# Altium PCB RX_DESIGN.pcbdoc
Units mil, origin at the board's own origin, x right, y up, seen from the top; angles counter-clockwise.
Board outline 2834.65 x 2834.65 mil, 2 copper layers (Top Layer, Bottom Layer); 44 components, 17 nets, 332 pads, 104 vias.
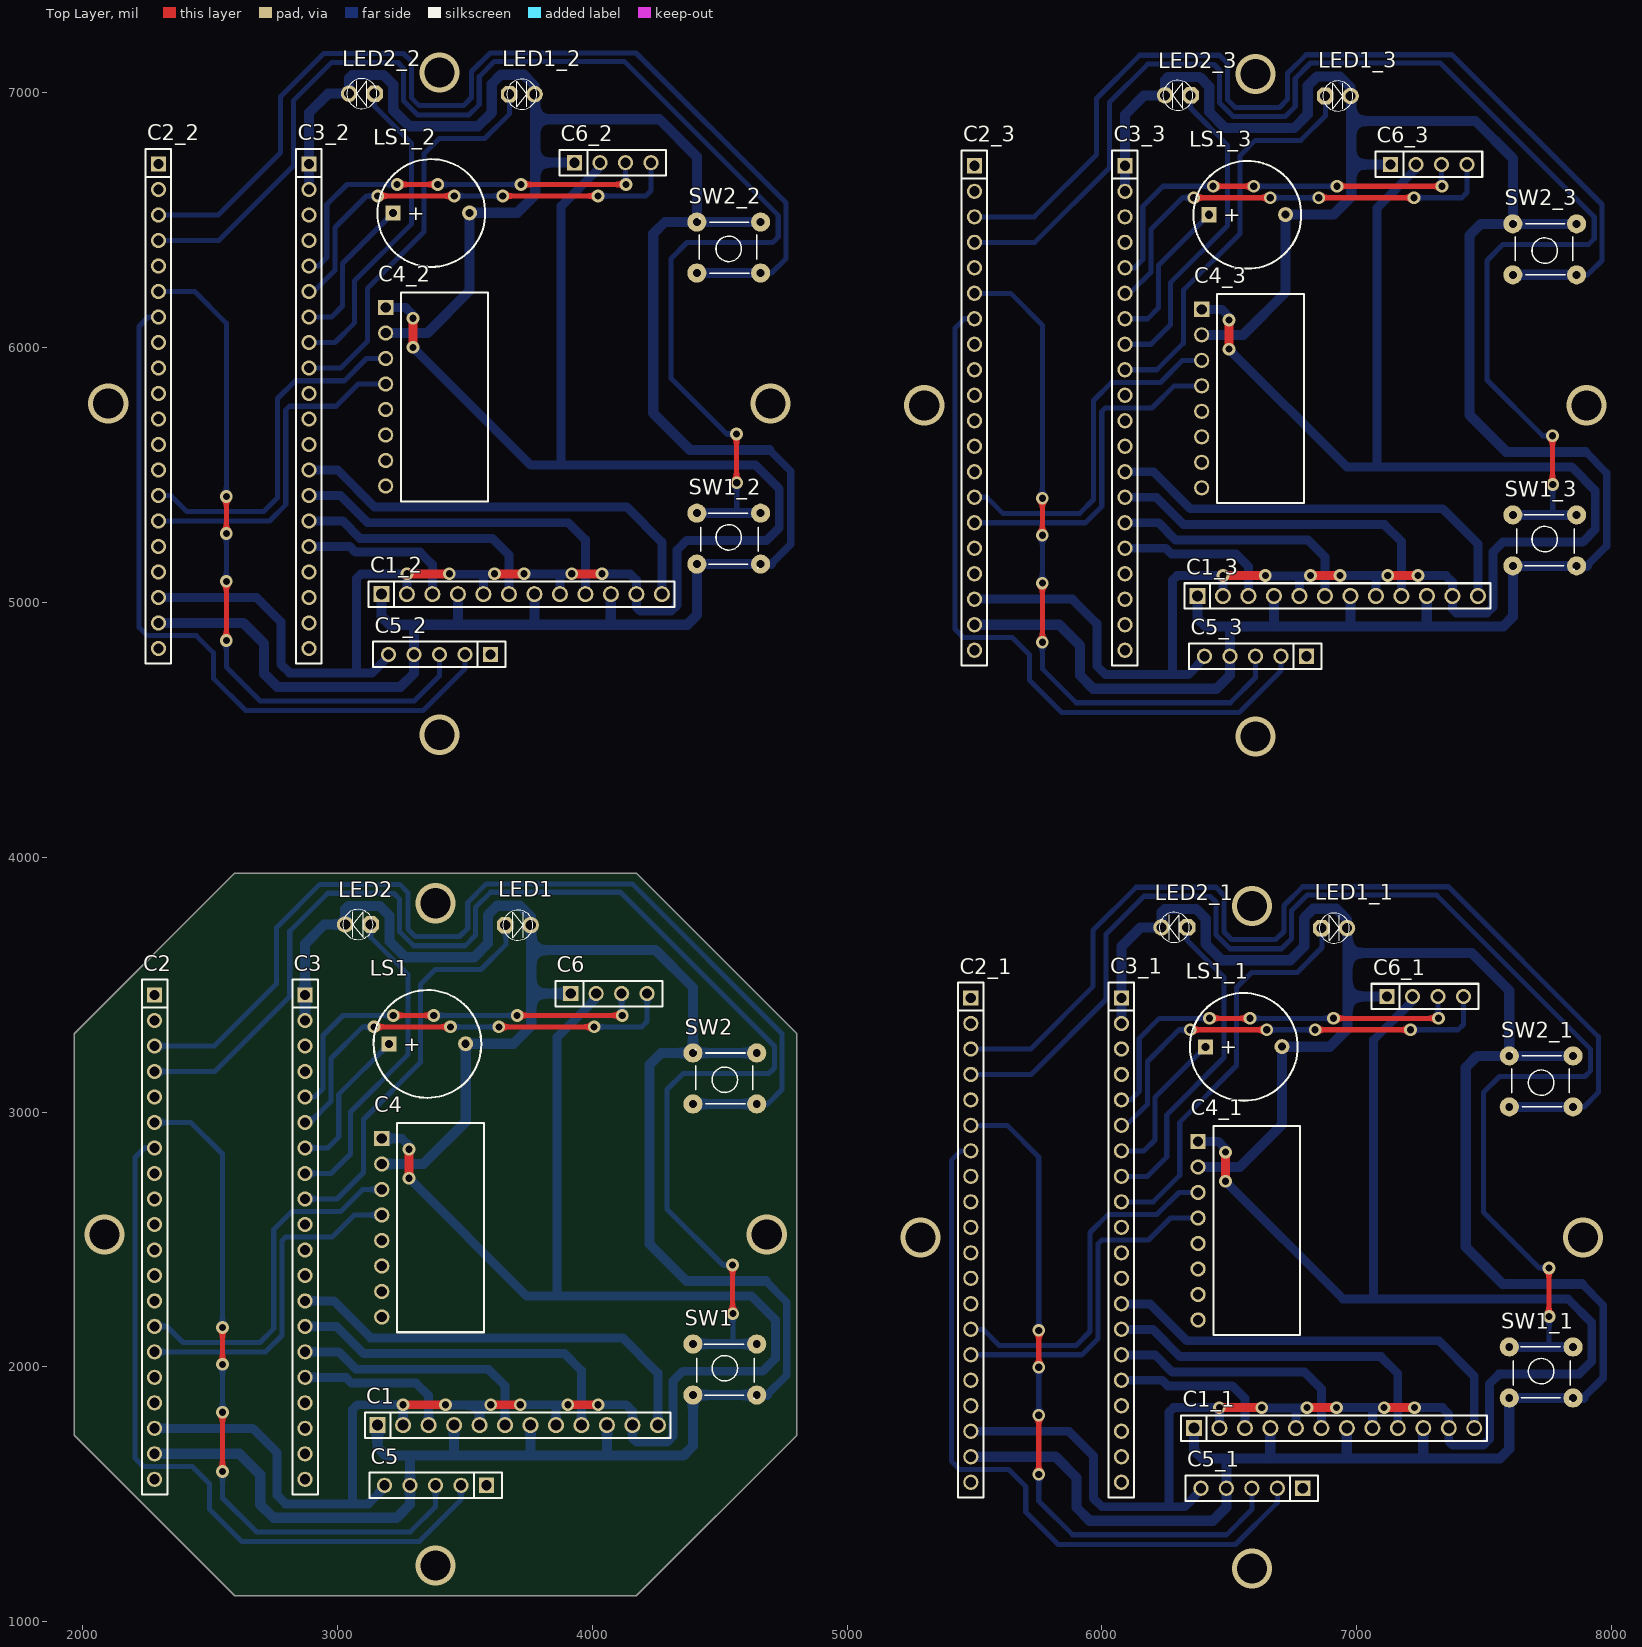
[diagram p0: Top Layer view]
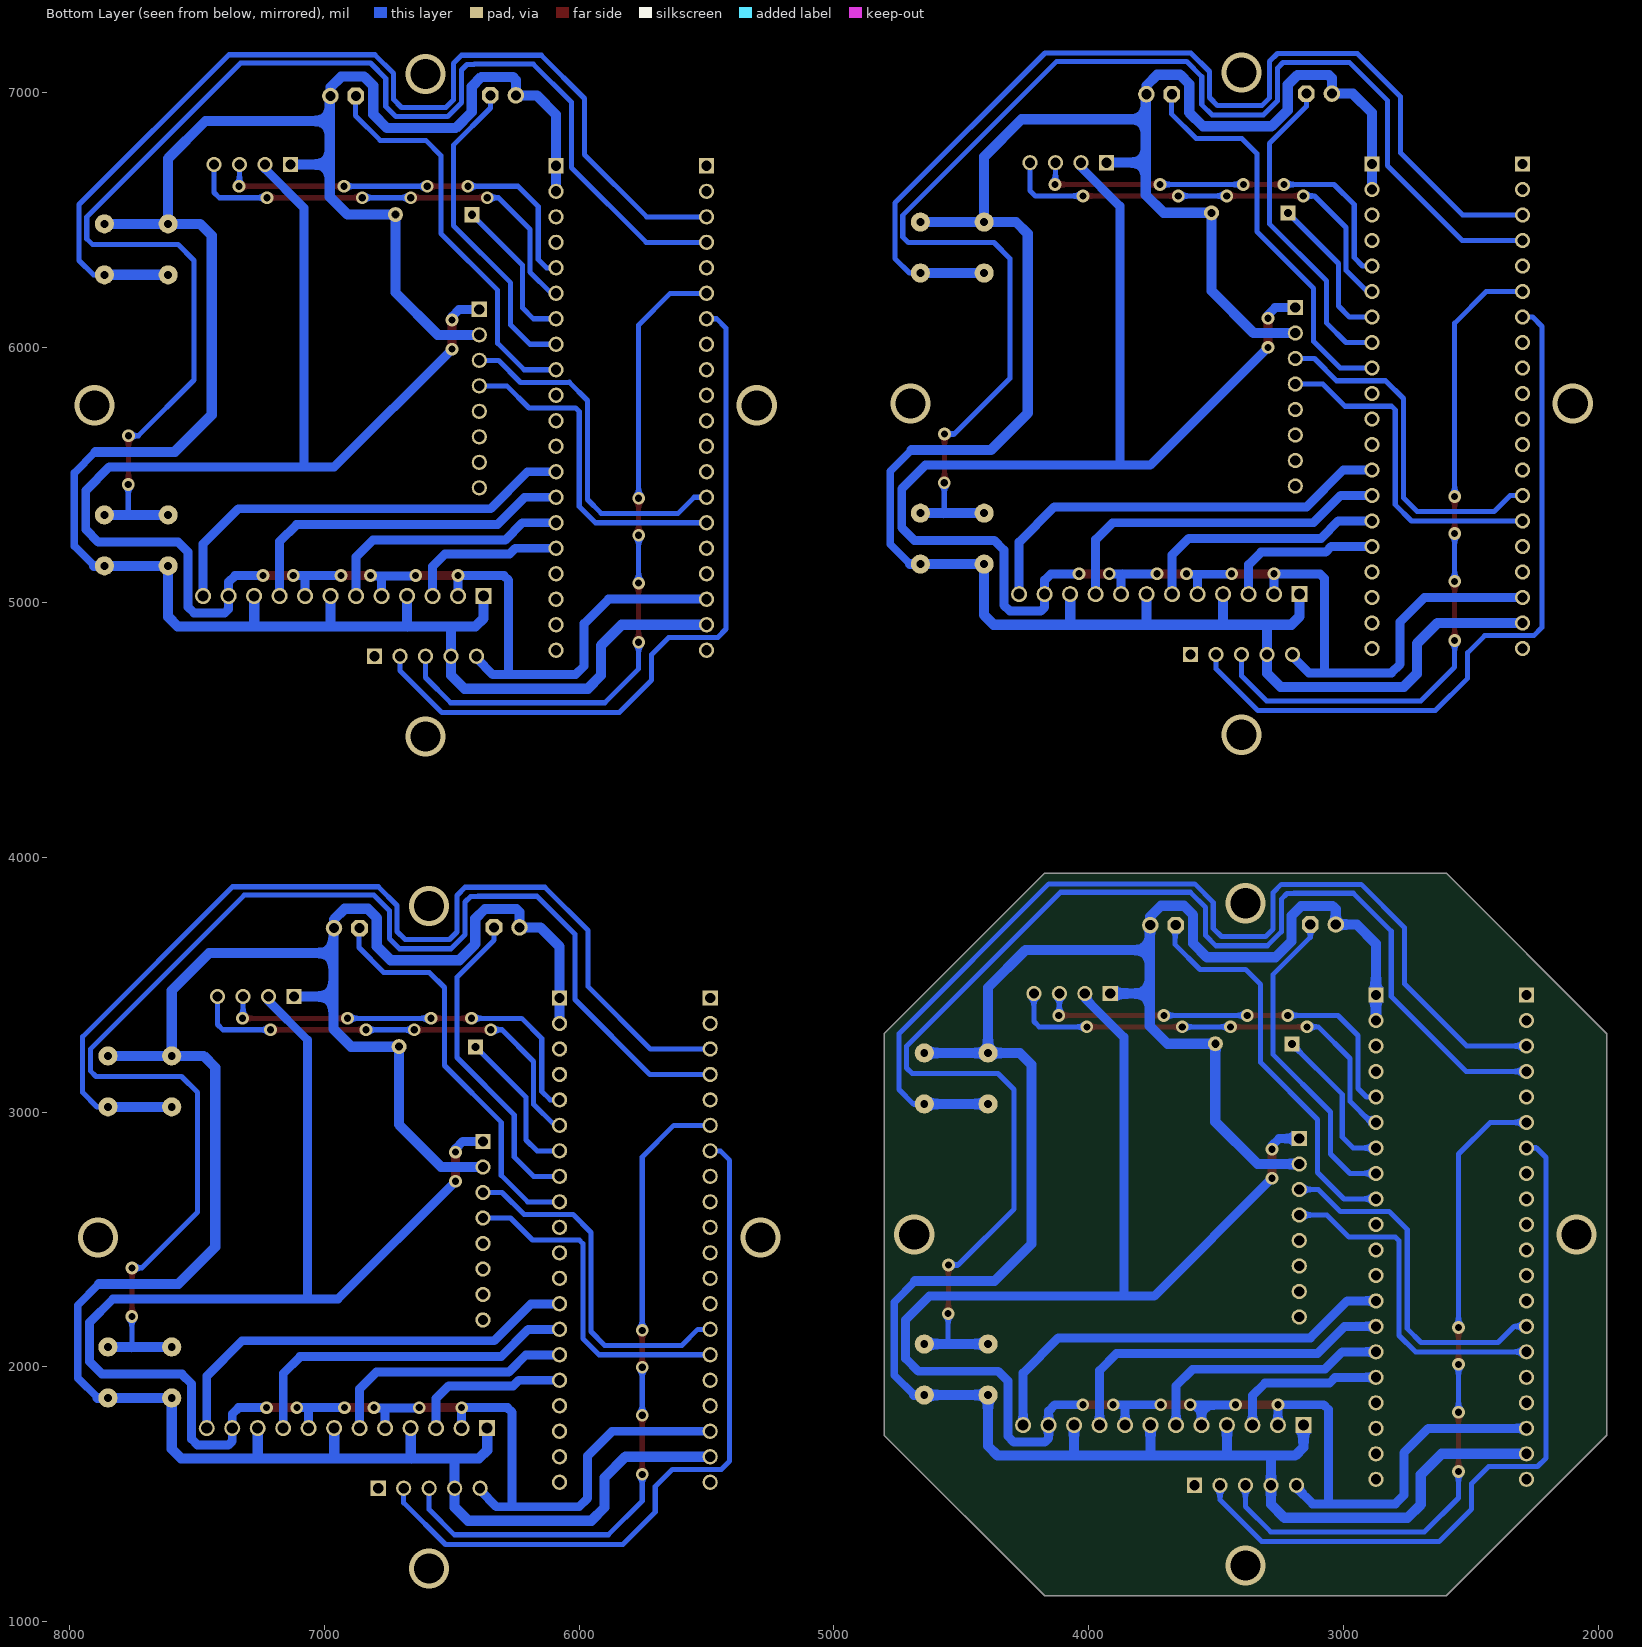
[diagram p1: Bottom Layer view, seen from below]

## Layer stack, top to bottom
Top Solder: solder mask 0.4, Solder Resist, Dk 3.5
Top Layer: signal copper 1.4
Dielectric 1: dielectric 12.6, FR-4, Dk 4.8
Bottom Layer: signal copper 1.4
Bottom Solder: solder mask 0.4, Solder Resist, Dk 3.5

## Board outline
1968.5,1732.28 2598.43,1102.36 4173.23,1102.36 4803.15,1732.28 4803.15,3307.09 4173.23,3937.01 2598.43,3937.01 1968.5,3307.09

## Design rules (kind name [scope] priority, off if disabled: settings)
Clearance [All] p1: gap=10 ignorepadtopadclearanceinfootprint=FALSE except(0: Arc-Hole Track-Hole SMDPad-Hole THPad-Hole Via-Hole Fill-Hole Poly-Hole Region-Hole Text-Hole)
PolygonConnect [All] p1: connectstyle=Relief reliefconductorwidth=10 reliefentries=4 polygonreliefangle="90 Angle" airgapwidth=10
RoutingVias [All] p1: holewidth=28 width=50 viastyle="Through Hole" minholewidth=28 minwidth=50 maxholewidth=28 maxwidth=50
SolderMaskExpansion [All] p1: expansion=4
Width [All] p1: maxlimit=40 minlimit=20 preferedwidth=30
30 further rules are at their usual default settings.

## Classes and differential pairs
component class Sheet1: C1 C2 C3 C4 C5 C6 LED1 LED2 LS1 SW1 SW2

## Components (designator, comment, footprint, x,y, rotation, side; value= is the part's Value field where it differs from the comment)
C1 "PWM PINS OUT" JP12-D1T 3158.27,1771.65 r0 top
C1_1 "PWM PINS OUT" JP12-D1T 6360.44,1760.18 r0 top (schematic designator C1)
C1_2 "PWM PINS OUT" JP12-D1T 3173.44,5031.18 r0 top (schematic designator C1)
C1_3 "PWM PINS OUT" JP12-D1T 6374.44,5024.18 r0 top (schematic designator C1)
C2 "STM32F103C8T6" JP20-C1T 2283.46,3459.06 r270 top
C2_1 "STM32F103C8T6" JP20-C1T 5485.64,3447.58 r270 top (schematic designator C2)
C2_2 "STM32F103C8T6" JP20-C1T 2298.64,6718.58 r270 top (schematic designator C2)
C2_3 "STM32F103C8T6" JP20-C1T 5499.64,6711.58 r270 top (schematic designator C2)
C3 "STM32F103C8T6" JP20-C1T 2874.02,3459.06 r270 top
C3_1 "STM32F103C8T6" JP20-C1T 6076.19,3447.58 r270 top (schematic designator C3)
C3_2 "STM32F103C8T6" JP20-C1T 2889.19,6718.58 r270 top (schematic designator C3)
C3_3 "STM32F103C8T6" JP20-C1T 6090.19,6711.58 r270 top (schematic designator C3)
C4 "MPU6050" JP8-C1C 3175,2546 r270 top
C4_1 "MPU6050" JP8-C1C 6377.17,2534.53 r270 top (schematic designator C4)
C4_2 "MPU6050" JP8-C1C 3190.17,5805.53 r270 top (schematic designator C4)
C4_3 "MPU6050" JP8-C1C 6391.17,5798.53 r270 top (schematic designator C4)
C5 "HC-12" JP5-C1T 3585.83,1535.43 r180 top
C5_1 "HC-12" JP5-C1T 6788,1523.96 r180 top (schematic designator C5)
C5_2 "HC-12" JP5-C1T 3601,4794.96 r180 top (schematic designator C5)
C5_3 "HC-12" JP5-C1T 6802,4787.96 r180 top (schematic designator C5)
C6 "I2C" JP4-C1T 3915.75,3464.57 r0 top
C6_1 "I2C" JP4-C1T 7117.92,3453.09 r0 top (schematic designator C6)
C6_2 "I2C" JP4-C1T 3930.92,6724.09 r0 top (schematic designator C6)
C6_3 "I2C" JP4-C1T 7131.92,6717.09 r0 top (schematic designator C6)
LED1 "LED" LED-3MM-YELLOW 3659,3733 r0 top value="LED 3 ly Single Colour"
LED1_1 "LED" LED-3MM-YELLOW 6861.17,3721.53 r0 top value="LED 3 ly Single Colour" (schematic designator LED1)
LED1_2 "LED" LED-3MM-YELLOW 3674.17,6992.53 r0 top value="LED 3 ly Single Colour" (schematic designator LED1)
LED1_3 "LED" LED-3MM-YELLOW 6875.17,6985.53 r0 top value="LED 3 ly Single Colour" (schematic designator LED1)
LED2 "LED" LED-3MM-YELLOW 3131.5,3735.52 r180 top value="LED 3 ly Single Colour"
LED2_1 "LED" LED-3MM-YELLOW 6333.67,3724.05 r180 top value="LED 3 ly Single Colour" (schematic designator LED2)
LED2_2 "LED" LED-3MM-YELLOW 3146.67,6995.05 r180 top value="LED 3 ly Single Colour" (schematic designator LED2)
LED2_3 "LED" LED-3MM-YELLOW 6347.67,6988.05 r180 top value="LED 3 ly Single Colour" (schematic designator LED2)
LS1 "Speaker" SPEAKER 3203.94,3267.22 r0 top
LS1_1 "Speaker" SPEAKER 6406.11,3255.74 r0 top (schematic designator LS1)
LS1_2 "Speaker" SPEAKER 3219.11,6526.74 r0 top (schematic designator LS1)
LS1_3 "Speaker" SPEAKER 6420.11,6519.74 r0 top (schematic designator LS1)
SW1 "SW" SW2-DIP 4395.67,2089.76 r0 top value="Button chip 4 pin"
SW1_1 "SW" SW2-DIP 7597.84,2078.29 r0 top value="Button chip 4 pin" (schematic designator SW1)
SW1_2 "SW" SW2-DIP 4410.84,5349.29 r0 top value="Button chip 4 pin" (schematic designator SW1)
SW1_3 "SW" SW2-DIP 7611.84,5342.29 r0 top value="Button chip 4 pin" (schematic designator SW1)
SW2 "SW" SW2-DIP 4645.67,3031.5 r180 top value="Button chip 4 pin"
SW2_1 "SW" SW2-DIP 7847.84,3020.02 r180 top value="Button chip 4 pin" (schematic designator SW2)
SW2_2 "SW" SW2-DIP 4660.84,6291.02 r180 top value="Button chip 4 pin" (schematic designator SW2)
SW2_3 "SW" SW2-DIP 7861.84,6284.02 r180 top value="Button chip 4 pin" (schematic designator SW2)

## Footprints (in the part's own frame and the unit in brackets; to place one, negate y for a bottom-side part, rotate by r counter-clockwise, add the part's x,y. Pads: shape width x height; smd on the part's side, far side on the other; paste and mask are expansions set on the pad)
JP4-C1T [mm] "4 row, straight, gold plating"
  rect 1.52x1.52 hole 1.02: 1(0,0)
  round 1.52 hole 1.02: 2(2.54,0) 3(5.08,0) 4(7.62,0)
  silkscreen extent -1.52,-1.27 9.14,1.27, body extent -1.52,-1.25 9.14,1.25, height 8.51
JP5-C1T [mm] "5 row, straight, gold plating"
  rect 1.52x1.52 hole 1.02: 1(0,0)
  round 1.52 hole 1.02: 2(2.54,0) 3(5.08,0) 4(7.62,0) 5(10.16,0)
  silkscreen extent -1.52,-1.27 11.68,1.27, body extent -1.52,-1.25 11.68,1.25, height 8.51
JP8-C1C [mm] "08p 1 row Right angle"
  rect 1.52x1.52 hole 1.02: 1(-8.89,0)
  round 1.52 hole 1.02: 2(-6.35,0) 3(-3.81,0) 4(-1.27,0) 5(1.27,0) 6(3.81,0) 7(6.35,0) 8(8.89,0)
  silkscreen extent -10.41,1.52 10.41,10.17, body extent -10.41,-0.25 10.41,10.05, height 2.51
JP12-D1T [mm] "12 pins, 1 row, straight, gold plating"
  rect 1.6x1.6 hole 1.1: 1(0,0)
  round 1.6 hole 1.1: 2(2.54,0) 3(5.08,0) 4(7.62,0) 5(10.16,0) 6(12.7,0) 7(15.24,0) 8(17.78,0) 9(20.32,0) 10(22.86,0) 11(25.4,0) 12(27.94,0)
  silkscreen extent -1.27,-1.27 29.21,1.27, body extent -1.27,-1.27 29.21,1.27, height 8.54
JP20-C1T [mm] "20 row, straight, gold plating"
  rect 1.52x1.52 hole 1.02: 1(0,0)
  round 1.52 hole 1.02: 2(2.54,0) 3(5.08,0) 4(7.62,0) 5(10.16,0) 6(12.7,0) 7(15.24,0) 8(17.78,0) 9(20.32,0) 10(22.86,0) 11(25.4,0) 12(27.94,0) 13(30.48,0) 14(33.02,0) 15(35.56,0) 16(38.1,0) 17(40.64,0) 18(43.18,0) 19(45.72,0) 20(48.26,0)
  silkscreen extent -1.52,-1.27 49.78,1.27, body extent -1.52,-1.25 49.78,1.25, height 8.51
LED-3MM-YELLOW [mil]
  oct 65x65 hole 40: 1(0,0)
  round 65 hole 40: 2(100,0)
  silkscreen extent -9,-59 109,59, body extent -27,-77 117,80, height 181
SPEAKER [mm]
  rect 1.5x1.5 hole 0.8: 1(0,0)
  round 1.5 hole 0.8: 2(7.62,0.013)
  silkscreen extent -1.55,-5.38 9.18,5.36, body extent -2.22,-6 13.24,6, height 4.5
SW2-DIP [mil] "SW button 4pin, 250 x250 mil"
  round 75 hole 31: 1(0,0) 2(0,-200) 3(250,-200) 4(250,0)
  silkscreen extent 15,-215 240,0, body extent -36,-220 276,24, height 276

## Part data
C1 C1_1 C1_2 C1_3: library part JP12, "WR-PHD 2.54 mm Angled Socket Header", Manufacturer="Würth Elektronik eiSos GmbH", partNo=613012143121, ComponentLink1 Description=Manufacturer, ComponentLink1URL=http://www.we-online.com, ComponentLink2 Description=Datasheet, ComponentLink2URL=http://katalog.we-online.de/em/datasheet/6130xx143121.pdf, Created by="Karrer Zheng", Created Date="29 March 2013", NoPins=12
C2 C2_1 C2_2 C2_3 C3 C3_1 C3_2 C3_3: library part JP20, "WR-PHD 2.54 mm Angled Socket Header", Manufacturer="Würth Elektronik eiSos GmbH", partNo=613020143121, ComponentLink1 Description=Manufacturer, ComponentLink1URL=http://www.we-online.com, ComponentLink2 Description=Datasheet, ComponentLink2URL=http://katalog.we-online.de/em/datasheet/6130xx143121.pdf, Created by="Karrer Zheng", Created Date="29 March 2013", NoPins=20
C4 C4_1 C4_2 C4_3: library part JP8, "WR-PHD 2.54 mm Angled Socket Header", Manufacturer="Würth Elektronik eiSos GmbH", partNo=613008143121, ComponentLink1 Description=Manufacturer, ComponentLink1URL=http://www.we-online.com, ComponentLink2 Description=Datasheet, ComponentLink2URL=http://katalog.we-online.de/em/datasheet/6130xx143121.pdf, Created by="Karrer Zheng", Created Date="29 March 2013", NoPins=08
C5 C5_1 C5_2 C5_3: library part JP5, "WR-PHD 2.54 mm Angled Socket Header", Manufacturer="Würth Elektronik eiSos GmbH", partNo=613005143121, ComponentLink1 Description=Manufacturer, ComponentLink1URL=http://www.we-online.com, ComponentLink2 Description=Datasheet, ComponentLink2URL=http://katalog.we-online.de/em/datasheet/6130xx143121.pdf, Created by="Karrer Zheng", Created Date="29 March 2013", NoPins=05
C6 C6_1 C6_2 C6_3: library part JP4, "WR-PHD 2.54 mm Angled Socket Header", Manufacturer="Würth Elektronik eiSos GmbH", partNo=613004143121, ComponentLink1 Description=Manufacturer, ComponentLink1URL=http://www.we-online.com, ComponentLink2 Description=Datasheet, ComponentLink2URL=http://katalog.we-online.de/em/datasheet/6130xx143121.pdf, Created by="Karrer Zheng", Created Date="29 March 2013", NoPins=04
LED1 LED1_1 LED1_2 LED1_3 LED2 LED2_1 LED2_2 LED2_3: "LED Single colour Green and Red"
LS1 LS1_1 LS1_2 LS1_3: "Loudspeaker", LatestRevisionDate=17-Jul-2002, LatestRevisionNote="Re-released for DXP Platform.", PackageReference=PIN2, Published=24-Mar-1999, Publisher="Altium Limited"
SW1 SW1_1 SW1_2 SW1_3 SW2 SW2_1 SW2_2 SW2_3: library part SW4, "Switch button 4 pin"

## Via types
v1: diameter 50, hole 28, Top Layer to Bottom Layer, 88 vias
v2: diameter 157.48, hole 118.11, Top Layer to Bottom Layer, 16 vias

## Nets (pads, with @x,y where several pads share a name; then routed paths per layer and width w, separated by ;. In a path a pad name is that pad's centre, name@x,y a point inside that pad or via, vN(x,y) a via of type N, cw(c..) or ccw(c..) an arc to the next point about the centre after c; other vN are vias at no path point)
BUZZER: C3.7 LS1.1 | length 597
  Bottom Layer w20: C3.7 2963.06,2859.06 3006,2902 3006,3069.28 LS1.1
GND: C1.1 C1.4 C1.7 C1.10 C2.19 C3.1 C3.2 C4.2 C5.4 C6.1 LED1.2 LED2.2 LS1.2 SW1.2 SW1.3 SW2.2 SW2.3 | length 9883.6
  Bottom Layer w30: 4681,2337 4764,2254 4764,1968 4685.76,1889.76
  Bottom Layer w40: C2.19 2615.94,1659.06 2698,1577 2698,1460 2750,1408 3233,1408 3285.83,1460.83 C5.4 3285.83,1651.83 3286,1652 ; C3.2 C3.1 2874.02,3660.02 2949.52,3735.52 LED2.2 3031.5,3795.5 3044,3808 3167,3808 3205,3770 3205,3670 3268,3607 3537,3607 3591,3661 3591,3773 3627,3809 3717,3809 3759,3767 LED1.2 3761.42,3730.58 3761.42,3635 ; C1.1 3158.27,1684.73 3191,1652 3286,1652 ; C4.2 3338,2796 3503.94,2961.94 LS1.2 3691.72,3267.72 3761.42,3337.42 3761.42,3464.57 ; C1.4 3458.27,1653.27 3457,1652 ; C1.7 3758.27,1654.73 3761,1652 ; C6.1 3761.42,3464.57 ; C1.10 4058.27,1652.73 4059,1652 ; SW2.2 SW2.3 ; 4681,2337 4370,2337 4225,2482 4225,3186 4270.5,3231.5 SW2.3 ; 4685.76,1889.76 SW1.3 SW1.2 4395.67,1689.67 4358,1652 4059,1652 ; 3286,1652 3457,1652 ; 3457,1652 3761,1652 ; 3761,1652 4059,1652 ; 3761.42,3464.57 3761.42,3635 ; 3761.42,3635 4249,3635 4395.67,3488.33 SW2.3
LED1: C3.9 LED1.1 | length 1579.2
  Bottom Layer w20: C3.9 2999.06,2659.06 3103,2763 3103,2971 3326,3194 3326,3500 3385,3559 3564,3559 3661.42,3656.42 3661.42,3730.58 LED1.1
LED2: C3.8 LED2.1 | length 1263.4
  Bottom Layer w20: C3.8 2976.06,2759.06 3052,2835 3052,3000 3277,3225 3277,3540 3131.5,3685.5 LED2.1
PWM1: C1.3 C3.16 | length 629.9
  Bottom Layer w35: C3.16 3033.94,1959.06 3056,1937 3309,1937 3358.27,1887.73 C1.3
PWM2: C1.6 C3.15 | length 993.6
  Bottom Layer w35: C3.15 3005.94,2059.06 3074,1991 3593,1991 3658.27,1925.73 C1.6
PWM3: C1.9 C3.14 | length 1370.1
  Bottom Layer w35: C3.14 2996.94,2159.06 3104,2052 3892,2052 3958.27,1985.73 C1.9
PWM4: C1.12 C3.13 | length 1705.7
  Bottom Layer w35: C3.13 2985.94,2259.06 3131,2114 4120,2114 4258.27,1975.73 C1.12
RXD: C2.6 C5.3 | length 2682.4
  Top Layer w20: v1(2550,1590) v1(2550,1822) ; v1(2550,2010) v1(2550,2155)
  Bottom Layer w20: C2.6 2425.94,2959.06 2550,2835 v1(2550,2155) ; v1(2550,1590) 2550,1486 2683,1353 3287,1353 3385.83,1451.83 C5.3 ; v1(2550,1822) v1(2550,2010)
SCL1: C2.14 C4.3 | length 1413.1
  Bottom Layer w20: C2.14 2331.94,2159.06 2395,2096 2697,2096 2751,2150 2751,2539 2822,2610 2822.87,2609.13 3013.13,2609.13 3100,2696 C4.3 C4.3@3162.02,2708.98
SCL2: C3.6 C6.4 | length 1713.9
  Top Layer w20: v1(3144,3334) v1(3444,3334) ; v1(3634,3334) v1(4008,3334)
  Bottom Layer w20: C3.6 2893.06,2959.06 2976,3042 2976,3210 3100,3334 v1(3144,3334) ; v1(3444,3334) v1(3634,3334) ; v1(4008,3334) 4195,3334 4215.75,3354.75 C6.4
SDA1: C2.15 C4.4 | length 1350.2
  Bottom Layer w20: C2.15 2719.06,2059.06 2783,2123 2783,2495 2796.98,2508.98 2979.98,2508.98 3067,2596 C4.4 C4.4@3162,2609
SDA2: C3.5 C6.3 | length 1584.9
  Top Layer w20: v1(3220,3379) v1(3379,3379) ; v1(3706,3379) v1(4118,3379)
  Bottom Layer w20: C3.5 2911.06,3059.06 2944,3092 2944,3300 3023,3379 v1(3220,3379) ; v1(3379,3379) v1(3706,3379) ; C6.3 4115.75,3381.25 v1(4118,3379)
SW1: C2.4 SW1.1 SW1.4 | length 5352.3
  Top Layer w20: v1(4551,2400) 4551,2210 v1(4552,2209)
  Bottom Layer w20: C2.4 2520.06,3159.06 2814,3453 2814,3709 2963,3858 3194.57,3858 3195.57,3857 3223,3857 3245,3835 3245,3707 3300,3652 3502,3652 3542,3692 3542,3802 3602,3862 4111,3862 4715,3258 4715,3173 4693,3151 4357,3151 4294,3088 4294,2619 4513,2400 v1(4551,2400) ; v1(4552,2209) 4552,2091.76 4554,2089.76
  Bottom Layer w40: SW1.1 4554,2089.76 SW1.4
SW2: C2.3 SW2.1 SW2.4 | length 4002.8
  Bottom Layer w20: C2.3 2518.06,3259.06 2762,3503 2762,3723 2932,3893 3245,3893 3277,3861 3277,3717.43 3306.43,3688 3480,3688 3512,3720 3512,3822 3585,3895 4157,3895 4745,3307 4745,3088 4688.5,3031.5 SW2.1
  Bottom Layer w40: SW2.4 SW2.1
TXD: C2.7 C5.2 | length 2869.1
  Bottom Layer w20: C2.7 2244.06,2859.06 2207,2822 2207,1642 2239.87,1609.13 2431.87,1609.13 2499,1542 2499,1442 2626,1315 3322,1315 3485.83,1478.83 C5.2
VCC: C1.2 C1.5 C1.8 C1.11 C2.18 C4.1 C5.5 C6.2 | length 7138.3
  Top Layer w35: v1(3258.27,1851.73) v1(3424.73,1851.73) ; v1(3282,2740) v1(3282,2854) ; v1(3602.27,1851.73) v1(3718,1851.73) v1@3720.73,1851.73 ; v1(3904.73,1851.73) v1(4023.73,1851.73)
  Bottom Layer w35: C2.18 2667.94,1759.06 2764,1663 2764,1497 2798,1463 3060,1463 3060,1833 3078.73,1851.73 v1(3258.27,1851.73) C1.2 ; 3062,1463 3122,1463 3185.83,1526.83 C5.5 ; C4.1 3254,2896 3282,2868 v1(3282,2854) ; v1(3282,2740) 3744,2278 3866,2278 ; v1(3424.73,1851.73) 3426.46,1850 3558.27,1850 ; C1.5 3558.27,1850 ; v1(3602.27,1851.73) 3600.54,1850 3558.27,1850 ; v1(3718,1851.73) 3854,1851.73 ; C1.8 3858.27,1847.46 3854,1851.73 ; v1(3904.73,1851.73) 3854,1851.73 ; C6.2 4015.75,3446.75 3863,3294 3863,2281 3866,2278 ; v1(4023.73,1851.73) 4133.27,1851.73 4158.27,1826.73 C1.11 4158.27,1720.73 4174,1705 4294,1705 4318,1729 4318,1945 4356,1983 4669,1983 4719,2033 4719,2185 4626,2278 3866,2278
pads on no net: C1_1.1 C1_1.2 C1_1.3 C1_1.4 C1_1.5 C1_1.6 C1_1.7 C1_1.8 C1_1.9 C1_1.10 C1_1.11 C1_1.12 C1_2.1 C1_2.2 C1_2.3 C1_2.4 C1_2.5 C1_2.6 C1_2.7 C1_2.8 C1_2.9 C1_2.10 C1_2.11 C1_2.12 C1_3.1 C1_3.2 C1_3.3 C1_3.4 C1_3.5 C1_3.6 C1_3.7 C1_3.8 C1_3.9 C1_3.10 C1_3.11 C1_3.12 C2.1 C2.2 C2.5 C2.8 C2.9 C2.10 C2.11 C2.12 C2.13 C2.16 C2.17 C2.20 C2_1.1 C2_1.2 C2_1.3 C2_1.4 C2_1.5 C2_1.6 C2_1.7 C2_1.8 C2_1.9 C2_1.10 C2_1.11 C2_1.12 C2_1.13 C2_1.14 C2_1.15 C2_1.16 C2_1.17 C2_1.18 C2_1.19 C2_1.20 C2_2.1 C2_2.2 C2_2.3 C2_2.4 C2_2.5 C2_2.6 C2_2.7 C2_2.8 C2_2.9 C2_2.10 C2_2.11 C2_2.12 C2_2.13 C2_2.14 C2_2.15 C2_2.16 C2_2.17 C2_2.18 C2_2.19 C2_2.20 C2_3.1 C2_3.2 C2_3.3 C2_3.4 C2_3.5 C2_3.6 C2_3.7 C2_3.8 C2_3.9 C2_3.10 C2_3.11 C2_3.12 C2_3.13 C2_3.14 C2_3.15 C2_3.16 C2_3.17 C2_3.18 C2_3.19 C2_3.20 C3.3 C3.4 C3.10 C3.11 C3.12 C3.17 C3.18 C3.19 C3.20 C3_1.1 C3_1.2 C3_1.3 C3_1.4 C3_1.5 C3_1.6 C3_1.7 C3_1.8 C3_1.9 C3_1.10 C3_1.11 C3_1.12 C3_1.13 C3_1.14 C3_1.15 C3_1.16 C3_1.17 C3_1.18 C3_1.19 C3_1.20 C3_2.1 C3_2.2 C3_2.3 C3_2.4 C3_2.5 C3_2.6 C3_2.7 C3_2.8 C3_2.9 C3_2.10 C3_2.11 C3_2.12 C3_2.13 C3_2.14 C3_2.15 C3_2.16 C3_2.17 C3_2.18 C3_2.19 C3_2.20 C3_3.1 C3_3.2 C3_3.3 C3_3.4 C3_3.5 C3_3.6 C3_3.7 C3_3.8 C3_3.9 C3_3.10 C3_3.11 C3_3.12 C3_3.13 C3_3.14 C3_3.15 C3_3.16 C3_3.17 C3_3.18 C3_3.19 C3_3.20 C4.5 C4.6 C4.7 C4.8 C4_1.1 C4_1.2 C4_1.3 C4_1.4 C4_1.5 C4_1.6 C4_1.7 C4_1.8 C4_2.1 C4_2.2 C4_2.3 C4_2.4 C4_2.5 C4_2.6 C4_2.7 C4_2.8 C4_3.1 C4_3.2 C4_3.3 C4_3.4 C4_3.5 C4_3.6 C4_3.7 C4_3.8 C5.1 C5_1.1 C5_1.2 C5_1.3 C5_1.4 C5_1.5 C5_2.1 C5_2.2 C5_2.3 C5_2.4 C5_2.5 C5_3.1 C5_3.2 C5_3.3 C5_3.4 C5_3.5 C6_1.1 C6_1.2 C6_1.3 C6_1.4 C6_2.1 C6_2.2 C6_2.3 C6_2.4 C6_3.1 C6_3.2 C6_3.3 C6_3.4 LED1_1.1 LED1_1.2 LED1_2.1 LED1_2.2 LED1_3.1 LED1_3.2 LED2_1.1 LED2_1.2 LED2_2.1 LED2_2.2 LED2_3.1 LED2_3.2 LS1_1.1 LS1_1.2 LS1_2.1 LS1_2.2 LS1_3.1 LS1_3.2 SW1_1.1 SW1_1.2 SW1_1.3 SW1_1.4 SW1_2.1 SW1_2.2 SW1_2.3 SW1_2.4 SW1_3.1 SW1_3.2 SW1_3.3 SW1_3.4 SW2_1.1 SW2_1.2 SW2_1.3 SW2_1.4 SW2_2.1 SW2_2.2 SW2_2.3 SW2_2.4 SW2_3.1 SW2_3.2 SW2_3.3 SW2_3.4
copper on no net: | length 138388.6
  Top Layer w20: v1(2565.17,4849.53) v1(2565.17,5081.53) ; v1(2565.17,5269.53) v1(2565.17,5414.53) ; v1(3159.17,6593.53) v1(3459.17,6593.53) ; v1(3235.17,6638.53) v1(3394.17,6638.53) ; v1(3649.17,6593.53) v1(4023.17,6593.53) ; v1(3721.17,6638.53) v1(4133.17,6638.53) ; v1(4566.17,5659.53) 4566.17,5469.53 v1(4567.17,5468.53) ; v1(5752.17,1578.53) v1(5752.17,1810.53) ; v1(5752.17,1998.53) v1(5752.17,2143.53) ; v1(5766.17,4842.53) v1(5766.17,5074.53) ; v1(5766.17,5262.53) v1(5766.17,5407.53) ; v1(6346.17,3322.53) v1(6646.17,3322.53) ; v1(6360.17,6586.53) v1(6660.17,6586.53) ; v1(6422.17,3367.53) v1(6581.17,3367.53) ; v1(6436.17,6631.53) v1(6595.17,6631.53) ; v1(6836.17,3322.53) v1(7210.17,3322.53) ; v1(6850.17,6586.53) v1(7224.17,6586.53) ; v1(6908.17,3367.53) v1(7320.17,3367.53) ; v1(6922.17,6631.53) v1(7334.17,6631.53) ; v1(7753.17,2388.53) 7753.17,2198.53 v1(7754.17,2197.53) ; v1(7767.17,5652.53) 7767.17,5462.53 v1(7768.17,5461.53)
  Top Layer w35: v1(3273.44,5111.26) v1(3439.91,5111.26) ; v1(3297.17,5999.53) v1(3297.17,6113.53) ; v1(3617.44,5111.26) v1(3733.17,5111.26) v1@3735.91,5111.26 ; v1(3919.91,5111.26) v1(4038.91,5111.26) ; v1(6460.44,1840.26) v1(6626.91,1840.26) ; v1(6474.44,5104.26) v1(6640.91,5104.26) ; v1(6484.17,2728.53) v1(6484.17,2842.53) ; v1(6498.17,5992.53) v1(6498.17,6106.53) ; v1(6804.44,1840.26) v1(6920.17,1840.26) v1@6922.91,1840.26 ; v1(6818.44,5104.26) v1(6934.17,5104.26) v1@6936.91,5104.26 ; v1(7106.91,1840.26) v1(7225.91,1840.26) ; v1(7120.91,5104.26) v1(7239.91,5104.26)
  Bottom Layer w20: 2298.64,5318.58 2734.23,5318.58 2798.17,5382.53 2798.17,5754.53 2812.15,5768.5 2995.15,5768.5 3082.17,5855.53 3190.17,5855.53 3177.17,5868.53 ; 2298.64,5418.58 2347.12,5418.58 2410.17,5355.53 2712.17,5355.53 2766.17,5409.53 2766.17,5798.53 2837.17,5869.53 2838.04,5868.66 3028.31,5868.66 3115.17,5955.53 3190.17,5955.53 3177.2,5968.5 ; 2298.64,6118.58 2259.23,6118.58 2222.17,6081.53 2222.17,4901.53 2255.04,4868.66 2447.04,4868.66 2514.17,4801.53 2514.17,4701.53 2641.17,4574.53 3337.17,4574.53 3501,4738.35 3501,4794.96 ; 2298.64,6218.58 2441.12,6218.58 2565.17,6094.53 v1(2565.17,5414.53) ; 2298.64,6418.58 2535.23,6418.58 2829.17,6712.53 2829.17,6968.53 2978.17,7117.53 3209.74,7117.53 3210.74,7116.53 3238.17,7116.53 3260.17,7094.53 3260.17,6966.53 3315.17,6911.53 3517.17,6911.53 3557.17,6951.53 3557.17,7061.53 3617.17,7121.53 4126.17,7121.53 4730.17,6517.53 4730.17,6432.53 4708.17,6410.53 4372.17,6410.53 4309.17,6347.53 4309.17,5878.53 4528.17,5659.53 v1(4566.17,5659.53) ; 2298.64,6518.58 2533.23,6518.58 2777.17,6762.53 2777.17,6982.53 2947.17,7152.53 3260.17,7152.53 3292.17,7120.53 3292.17,6976.95 3321.6,6947.53 3495.17,6947.53 3527.17,6979.53 3527.17,7081.53 3600.17,7154.53 4172.17,7154.53 4760.17,6566.53 4760.17,6347.53 4703.67,6291.02 4660.84,6291.02 ; v1(2565.17,4849.53) 2565.17,4745.53 2698.17,4612.53 3302.17,4612.53 3401,4711.35 3401,4794.96 ; v1(2565.17,5081.53) v1(2565.17,5269.53) ; 2889.19,5918.58 3014.23,5918.58 3118.17,6022.53 3118.17,6230.53 3341.17,6453.53 3341.17,6759.53 3400.17,6818.53 3579.17,6818.53 3676.59,6915.94 3676.59,6990.11 3674.17,6992.53 ; 2889.19,6018.58 2991.23,6018.58 3067.17,6094.53 3067.17,6259.53 3292.17,6484.53 3292.17,6799.53 3146.67,6945.03 3146.67,6995.05 ; 2889.19,6118.58 2978.23,6118.58 3021.17,6161.53 3021.17,6328.81 3219.11,6526.74 ; 2889.19,6218.58 2908.23,6218.58 2991.17,6301.53 2991.17,6469.53 3115.17,6593.53 v1(3159.17,6593.53) ; 2889.19,6318.58 2926.23,6318.58 2959.17,6351.53 2959.17,6559.53 3038.17,6638.53 v1(3235.17,6638.53) ; v1(3394.17,6638.53) v1(3721.17,6638.53) ; v1(3459.17,6593.53) v1(3649.17,6593.53) ; v1(4023.17,6593.53) 4210.17,6593.53 4230.92,6614.28 4230.92,6724.09 ; 4130.92,6724.09 4130.92,6640.78 v1(4133.17,6638.53) ; v1(4567.17,5468.53) 4567.17,5351.29 4569.17,5349.29 ; 5485.64,2047.58 5921.23,2047.58 5985.17,2111.53 5985.17,2483.53 5999.15,2497.5 6182.15,2497.5 6269.17,2584.53 6377.17,2584.53 6364.17,2597.53 ; 5485.64,2147.58 5534.12,2147.58 5597.17,2084.53 5899.17,2084.53 5953.17,2138.53 5953.17,2527.53 6024.17,2598.53 6025.04,2597.66 6215.31,2597.66 6302.17,2684.53 6377.17,2684.53 6364.2,2697.5 ; 5485.64,2847.58 5446.23,2847.58 5409.17,2810.53 5409.17,1630.53 5442.04,1597.66 5634.04,1597.66 5701.17,1530.53 5701.17,1430.53 5828.17,1303.53 6524.17,1303.53 6688,1467.35 6688,1523.96 ; 5485.64,2947.58 5628.12,2947.58 5752.17,2823.53 v1(5752.17,2143.53) ; 5485.64,3147.58 5722.23,3147.58 6016.17,3441.53 6016.17,3697.53 6165.17,3846.53 6396.74,3846.53 6397.74,3845.53 6425.17,3845.53 6447.17,3823.53 6447.17,3695.53 6502.17,3640.53 6704.17,3640.53 6744.17,3680.53 6744.17,3790.53 6804.17,3850.53 7313.17,3850.53 7917.17,3246.53 7917.17,3161.53 7895.17,3139.53 7559.17,3139.53 7496.17,3076.53 7496.17,2607.53 7715.17,2388.53 v1(7753.17,2388.53) ; 5485.64,3247.58 5720.23,3247.58 5964.17,3491.53 5964.17,3711.53 6134.17,3881.53 6447.17,3881.53 6479.17,3849.53 6479.17,3705.95 6508.6,3676.53 6682.17,3676.53 6714.17,3708.53 6714.17,3810.53 6787.17,3883.53 7359.17,3883.53 7947.17,3295.53 7947.17,3076.53 7890.67,3020.02 7847.84,3020.02 ; 5499.64,5311.58 5935.23,5311.58 5999.17,5375.53 5999.17,5747.53 6013.15,5761.5 6196.15,5761.5 6283.17,5848.53 6391.17,5848.53 6378.17,5861.53 ; 5499.64,5411.58 5548.12,5411.58 5611.17,5348.53 5913.17,5348.53 5967.17,5402.53 5967.17,5791.53 6038.17,5862.53 6039.04,5861.66 6229.31,5861.66 6316.17,5948.53 6391.17,5948.53 6378.2,5961.5 ; 5499.64,6111.58 5460.23,6111.58 5423.17,6074.53 5423.17,4894.53 5456.04,4861.66 5648.04,4861.66 5715.17,4794.53 5715.17,4694.53 5842.17,4567.53 6538.17,4567.53 6702,4731.35 6702,4787.96 ; 5499.64,6211.58 5642.12,6211.58 5766.17,6087.53 v1(5766.17,5407.53) ; 5499.64,6411.58 5736.23,6411.58 6030.17,6705.53 6030.17,6961.53 6179.17,7110.53 6410.74,7110.53 6411.74,7109.53 6439.17,7109.53 6461.17,7087.53 6461.17,6959.53 6516.17,6904.53 6718.17,6904.53 6758.17,6944.53 6758.17,7054.53 6818.17,7114.53 7327.17,7114.53 7931.17,6510.53 7931.17,6425.53 7909.17,6403.53 7573.17,6403.53 7510.17,6340.53 7510.17,5871.53 7729.17,5652.53 v1(7767.17,5652.53) ; 5499.64,6511.58 5734.23,6511.58 5978.17,6755.53 5978.17,6975.53 6148.17,7145.53 6461.17,7145.53 6493.17,7113.53 6493.17,6969.95 6522.6,6940.53 6696.17,6940.53 6728.17,6972.53 6728.17,7074.53 6801.17,7147.53 7373.17,7147.53 7961.17,6559.53 7961.17,6340.53 7904.67,6284.02 7861.84,6284.02 ; v1(5752.17,1578.53) 5752.17,1474.53 5885.17,1341.53 6489.17,1341.53 6588,1440.35 6588,1523.96 ; v1(5752.17,1810.53) v1(5752.17,1998.53) ; v1(5766.17,4842.53) 5766.17,4738.53 5899.17,4605.53 6503.17,4605.53 6602,4704.35 6602,4787.96 ; v1(5766.17,5074.53) v1(5766.17,5262.53) ; 6076.19,2647.58 6201.23,2647.58 6305.17,2751.53 6305.17,2959.53 6528.17,3182.53 6528.17,3488.53 6587.17,3547.53 6766.17,3547.53 6863.59,3644.94 6863.59,3719.11 6861.17,3721.53 ; 6076.19,2747.58 6178.23,2747.58 6254.17,2823.53 6254.17,2988.53 6479.17,3213.53 6479.17,3528.53 6333.67,3674.03 6333.67,3724.05 ; 6076.19,2847.58 6165.23,2847.58 6208.17,2890.53 6208.17,3057.81 6406.11,3255.74 ; 6076.19,2947.58 6095.23,2947.58 6178.17,3030.53 6178.17,3198.53 6302.17,3322.53 v1(6346.17,3322.53) ; 6076.19,3047.58 6113.23,3047.58 6146.17,3080.53 6146.17,3288.53 6225.17,3367.53 v1(6422.17,3367.53) ; 6090.19,5911.58 6215.23,5911.58 6319.17,6015.53 6319.17,6223.53 6542.17,6446.53 6542.17,6752.53 6601.17,6811.53 6780.17,6811.53 6877.59,6908.94 6877.59,6983.11 6875.17,6985.53 ; 6090.19,6011.58 6192.23,6011.58 6268.17,6087.53 6268.17,6252.53 6493.17,6477.53 6493.17,6792.53 6347.67,6938.03 6347.67,6988.05 ; 6090.19,6111.58 6179.23,6111.58 6222.17,6154.53 6222.17,6321.81 6420.11,6519.74 ; 6090.19,6211.58 6109.23,6211.58 6192.17,6294.53 6192.17,6462.53 6316.17,6586.53 v1(6360.17,6586.53) ; 6090.19,6311.58 6127.23,6311.58 6160.17,6344.53 6160.17,6552.53 6239.17,6631.53 v1(6436.17,6631.53) ; v1(6581.17,3367.53) v1(6908.17,3367.53) ; v1(6595.17,6631.53) v1(6922.17,6631.53) ; v1(6646.17,3322.53) v1(6836.17,3322.53) ; v1(6660.17,6586.53) v1(6850.17,6586.53) ; v1(7210.17,3322.53) 7397.17,3322.53 7417.92,3343.28 7417.92,3453.09 ; v1(7224.17,6586.53) 7411.17,6586.53 7431.92,6607.28 7431.92,6717.09 ; 7317.92,3453.09 7317.92,3369.78 v1(7320.17,3367.53) ; 7331.92,6717.09 7331.92,6633.78 v1(7334.17,6631.53) ; v1(7754.17,2197.53) 7754.17,2080.29 7756.17,2078.29 ; v1(7768.17,5461.53) 7768.17,5344.29 7770.17,5342.29
  Bottom Layer w30: 4696.17,5596.53 4779.17,5513.53 4779.17,5227.53 4700.94,5149.29 ; 7883.17,2325.53 7966.17,2242.53 7966.17,1956.53 7887.94,1878.29 ; 7897.17,5589.53 7980.17,5506.53 7980.17,5220.53 7901.94,5142.29
  Bottom Layer w35: 2298.64,5018.58 2683.12,5018.58 2779.17,4922.53 2779.17,4756.53 2813.17,4722.53 3075.17,4722.53 3075.17,5092.53 3093.91,5111.26 v1(3273.44,5111.26) 3273.44,5031.18 ; 2889.19,5218.58 3049.12,5218.58 3071.17,5196.53 3324.17,5196.53 3373.44,5147.26 3373.44,5031.18 ; 2889.19,5318.58 3021.12,5318.58 3089.17,5250.53 3608.17,5250.53 3673.44,5185.26 3673.44,5031.18 ; 2889.19,5418.58 3012.12,5418.58 3119.17,5311.53 3907.17,5311.53 3973.44,5245.26 3973.44,5031.18 ; 2889.19,5518.58 3001.12,5518.58 3146.17,5373.53 4135.17,5373.53 4273.44,5235.26 4273.44,5031.18 ; 3077.17,4722.53 3137.17,4722.53 3201,4786.35 3201,4794.96 ; 3190.17,6155.53 3269.17,6155.53 3297.17,6127.53 v1(3297.17,6113.53) ; v1(3297.17,5999.53) 3759.17,5537.53 3881.17,5537.53 ; v1(3439.91,5111.26) 3441.64,5109.53 3573.44,5109.53 ; 3573.44,5031.18 3573.44,5109.53 ; v1(3617.44,5111.26) 3615.71,5109.53 3573.44,5109.53 ; v1(3733.17,5111.26) 3869.17,5111.26 ; 3873.44,5031.18 3873.44,5106.99 3869.17,5111.26 ; v1(3919.91,5111.26) 3869.17,5111.26 ; 4030.92,6724.09 4030.92,6706.28 3878.17,6553.53 3878.17,5540.53 3881.17,5537.53 ; v1(4038.91,5111.26) 4148.44,5111.26 4173.44,5086.26 4173.44,5031.18 4173.44,4980.26 4189.17,4964.53 4309.17,4964.53 4333.17,4988.53 4333.17,5204.53 4371.17,5242.53 4684.17,5242.53 4734.17,5292.53 4734.17,5444.53 4641.17,5537.53 3881.17,5537.53 ; 5485.64,1747.58 5870.12,1747.58 5966.17,1651.53 5966.17,1485.53 6000.17,1451.53 6262.17,1451.53 6262.17,1821.53 6280.91,1840.26 v1(6460.44,1840.26) 6460.44,1760.18 ; 5499.64,5011.58 5884.12,5011.58 5980.17,4915.53 5980.17,4749.53 6014.17,4715.53 6276.17,4715.53 6276.17,5085.53 6294.91,5104.26 v1(6474.44,5104.26) 6474.44,5024.18 ; 6076.19,1947.58 6236.12,1947.58 6258.17,1925.53 6511.17,1925.53 6560.44,1876.26 6560.44,1760.18 ; 6076.19,2047.58 6208.12,2047.58 6276.17,1979.53 6795.17,1979.53 6860.44,1914.26 6860.44,1760.18 ; 6076.19,2147.58 6199.12,2147.58 6306.17,2040.53 7094.17,2040.53 7160.44,1974.26 7160.44,1760.18 ; 6076.19,2247.58 6188.12,2247.58 6333.17,2102.53 7322.17,2102.53 7460.44,1964.26 7460.44,1760.18 ; 6090.19,5211.58 6250.12,5211.58 6272.17,5189.53 6525.17,5189.53 6574.44,5140.26 6574.44,5024.18 ; 6090.19,5311.58 6222.12,5311.58 6290.17,5243.53 6809.17,5243.53 6874.44,5178.26 6874.44,5024.18 ; 6090.19,5411.58 6213.12,5411.58 6320.17,5304.53 7108.17,5304.53 7174.44,5238.26 7174.44,5024.18 ; 6090.19,5511.58 6202.12,5511.58 6347.17,5366.53 7336.17,5366.53 7474.44,5228.26 7474.44,5024.18 ; 6264.17,1451.53 6324.17,1451.53 6388,1515.35 6388,1523.96 ; 6278.17,4715.53 6338.17,4715.53 6402,4779.35 6402,4787.96 ; 6377.17,2884.53 6456.17,2884.53 6484.17,2856.53 v1(6484.17,2842.53) ; 6391.17,6148.53 6470.17,6148.53 6498.17,6120.53 v1(6498.17,6106.53) ; v1(6484.17,2728.53) 6946.17,2266.53 7068.17,2266.53 ; v1(6498.17,5992.53) 6960.17,5530.53 7082.17,5530.53 ; v1(6626.91,1840.26) 6628.64,1838.53 6760.44,1838.53 ; v1(6640.91,5104.26) 6642.64,5102.53 6774.44,5102.53 ; 6760.44,1760.18 6760.44,1838.53 ; 6774.44,5024.18 6774.44,5102.53 ; v1(6804.44,1840.26) 6802.71,1838.53 6760.44,1838.53 ; v1(6818.44,5104.26) 6816.71,5102.53 6774.44,5102.53 ; v1(6920.17,1840.26) 7056.17,1840.26 ; v1(6934.17,5104.26) 7070.17,5104.26 ; 7060.44,1760.18 7060.44,1835.99 7056.17,1840.26 ; 7074.44,5024.18 7074.44,5099.99 7070.17,5104.26 ; v1(7106.91,1840.26) 7056.17,1840.26 ; v1(7120.91,5104.26) 7070.17,5104.26 ; 7217.92,3453.09 7217.92,3435.28 7065.17,3282.53 7065.17,2269.53 7068.17,2266.53 ; v1(7225.91,1840.26) 7335.44,1840.26 7360.44,1815.26 7360.44,1760.18 7360.44,1709.26 7376.17,1693.53 7496.17,1693.53 7520.17,1717.53 7520.17,1933.53 7558.17,1971.53 7871.17,1971.53 7921.17,2021.53 7921.17,2173.53 7828.17,2266.53 7068.17,2266.53 ; 7231.92,6717.09 7231.92,6699.28 7079.17,6546.53 7079.17,5533.53 7082.17,5530.53 ; v1(7239.91,5104.26) 7349.44,5104.26 7374.44,5079.26 7374.44,5024.18 7374.44,4973.26 7390.17,4957.53 7510.17,4957.53 7534.17,4981.53 7534.17,5197.53 7572.17,5235.53 7885.17,5235.53 7935.17,5285.53 7935.17,5437.53 7842.17,5530.53 7082.17,5530.53
  Bottom Layer w40: 2298.64,4918.58 2631.12,4918.58 2713.17,4836.53 2713.17,4719.53 2765.17,4667.53 3248.17,4667.53 3301,4720.35 3301,4794.96 3301,4911.35 3301.17,4911.53 ; 2889.19,6618.58 2889.19,6718.58 2889.19,6919.54 2964.69,6995.05 3046.67,6995.05 3046.67,7055.02 3059.17,7067.53 3182.17,7067.53 3220.17,7029.53 3220.17,6929.53 3283.17,6866.53 3552.17,6866.53 3606.17,6920.53 3606.17,7032.53 3642.17,7068.53 3732.17,7068.53 3774.17,7026.53 3774.17,6992.53 3776.59,6990.11 3776.59,6894.53 ; 3173.44,5031.18 3173.44,4944.26 3206.17,4911.53 3301.17,4911.53 ; 3190.17,6055.53 3353.17,6055.53 3519.11,6221.46 3519.11,6527.24 3706.89,6527.24 3776.59,6596.94 3776.59,6724.09 ; 3473.44,5031.18 3473.44,4912.8 3472.17,4911.53 ; 3773.44,5031.18 3773.44,4914.26 3776.17,4911.53 ; 3930.92,6724.09 3776.59,6724.09 ; 4073.44,5031.18 4073.44,4912.26 4074.17,4911.53 ; 4410.84,5349.29 4569.17,5349.29 4660.84,5349.29 ; 4410.84,6291.02 4660.84,6291.02 ; 4660.84,6491.02 4410.84,6491.02 ; 4696.17,5596.53 4385.17,5596.53 4240.17,5741.53 4240.17,6445.53 4285.67,6491.02 4410.84,6491.02 ; 4700.94,5149.29 4660.84,5149.29 4410.84,5149.29 4410.84,4949.2 4373.17,4911.53 4074.17,4911.53 ; 5485.64,1647.58 5818.12,1647.58 5900.17,1565.53 5900.17,1448.53 5952.17,1396.53 6435.17,1396.53 6488,1449.35 6488,1523.96 6488,1640.35 6488.17,1640.53 ; 5499.64,4911.58 5832.12,4911.58 5914.17,4829.53 5914.17,4712.53 5966.17,4660.53 6449.17,4660.53 6502,4713.35 6502,4787.96 6502,4904.35 6502.17,4904.53 ; 6076.19,3347.58 6076.19,3447.58 6076.19,3648.54 6151.69,3724.05 6233.67,3724.05 6233.67,3784.02 6246.17,3796.53 6369.17,3796.53 6407.17,3758.53 6407.17,3658.53 6470.17,3595.53 6739.17,3595.53 6793.17,3649.53 6793.17,3761.53 6829.17,3797.53 6919.17,3797.53 6961.17,3755.53 6961.17,3721.53 6963.59,3719.11 6963.59,3623.53 ; 6090.19,6611.58 6090.19,6711.58 6090.19,6912.54 6165.69,6988.05 6247.67,6988.05 6247.67,7048.02 6260.17,7060.53 6383.17,7060.53 6421.17,7022.53 6421.17,6922.53 6484.17,6859.53 6753.17,6859.53 6807.17,6913.53 6807.17,7025.53 6843.17,7061.53 6933.17,7061.53 6975.17,7019.53 6975.17,6985.53 6977.59,6983.11 6977.59,6887.53 ; 6360.44,1760.18 6360.44,1673.26 6393.17,1640.53 6488.17,1640.53 ; 6374.44,5024.18 6374.44,4937.26 6407.17,4904.53 6502.17,4904.53 ; 6377.17,2784.53 6540.17,2784.53 6706.11,2950.46 6706.11,3256.24 6893.89,3256.24 6963.59,3325.94 6963.59,3453.09 ; 6391.17,6048.53 6554.17,6048.53 6720.11,6214.46 6720.11,6520.24 6907.89,6520.24 6977.59,6589.94 6977.59,6717.09 ; 6660.44,1760.18 6660.44,1641.8 6659.17,1640.53 ; 6674.44,5024.18 6674.44,4905.8 6673.17,4904.53 ; 6960.44,1760.18 6960.44,1643.26 6963.17,1640.53 ; 6974.44,5024.18 6974.44,4907.26 6977.17,4904.53 ; 7117.92,3453.09 6963.59,3453.09 ; 7131.92,6717.09 6977.59,6717.09 ; 7260.44,1760.18 7260.44,1641.26 7261.17,1640.53 ; 7274.44,5024.18 7274.44,4905.26 7275.17,4904.53 ; 7597.84,2078.29 7756.17,2078.29 7847.84,2078.29 ; 7597.84,3020.02 7847.84,3020.02 ; 7611.84,5342.29 7770.17,5342.29 7861.84,5342.29 ; 7611.84,6284.02 7861.84,6284.02 ; 7847.84,3220.02 7597.84,3220.02 ; 7861.84,6484.02 7611.84,6484.02 ; 7883.17,2325.53 7572.17,2325.53 7427.17,2470.53 7427.17,3174.53 7472.67,3220.02 7597.84,3220.02 ; 7887.94,1878.29 7847.84,1878.29 7597.84,1878.29 7597.84,1678.2 7560.17,1640.53 7261.17,1640.53 ; 7897.17,5589.53 7586.17,5589.53 7441.17,5734.53 7441.17,6438.53 7486.67,6484.02 7611.84,6484.02 ; 7901.94,5142.29 7861.84,5142.29 7611.84,5142.29 7611.84,4942.2 7574.17,4904.53 7275.17,4904.53 ; 3301.17,4911.53 3472.17,4911.53 ; 3472.17,4911.53 3776.17,4911.53 ; 3776.17,4911.53 4074.17,4911.53 ; 3776.59,6724.09 3776.59,6894.53 ; 3776.59,6894.53 4264.17,6894.53 4410.84,6747.86 4410.84,6491.02 ; 6488.17,1640.53 6659.17,1640.53 ; 6502.17,4904.53 6673.17,4904.53 ; 6659.17,1640.53 6963.17,1640.53 ; 6673.17,4904.53 6977.17,4904.53 ; 6963.17,1640.53 7261.17,1640.53 ; 6963.59,3453.09 6963.59,3623.53 ; 6963.59,3623.53 7451.17,3623.53 7597.84,3476.86 7597.84,3220.02 ; 6977.17,4904.53 7275.17,4904.53 ; 6977.59,6717.09 6977.59,6887.53 ; 6977.59,6887.53 7465.17,6887.53 7611.84,6740.86 7611.84,6484.02
  other v2: 6588,1209 3385.83,1220.47 5288.79,2508.21 7887.21,2508.21 2086.61,2519.68 4685.04,2519.68 6588,3807.43 3385.83,3818.9 6602,4473 3401,4480 5302.79,5772.21 7901.21,5772.21 2101.79,5779.21 4700.21,5779.21 6602,7071.43 3401,7078.43

## Silkscreen, mask and mechanical layers (free items; w line width, h text height)
Mechanical 1:
  lines w20: 1968.5,1732.28 2598.43,1102.36 4173.23,1102.36 4803.15,1732.28 4803.15,3307.09 4173.23,3937.01 2598.43,3937.01 1968.5,3307.09 1968.5,1732.28 ; 1983.68,4991.81 1983.68,6566.61 2613.6,7196.54 4188.4,7196.54 4818.32,6566.61 4818.32,4991.81 4188.4,4361.89 2613.6,4361.89 1983.68,4991.81 ; 5170.68,1720.81 5170.68,3295.61 5800.6,3925.54 7375.4,3925.54 8005.32,3295.61 8005.32,1720.81 7375.4,1090.89 5800.6,1090.89 5170.68,1720.81 ; 5184.68,4984.81 5184.68,6559.61 5814.6,7189.54 7389.4,7189.54 8019.32,6559.61 8019.32,4984.81 7389.4,4354.89 5814.6,4354.89 5184.68,4984.81

## Text inside footprints (layer, text, board x,y; h text height)
LS1: Top Overlay "+" at 3259.44,3239.22 h60
LS1_1: Top Overlay "+" at 6461.61,3227.74 h60
LS1_2: Top Overlay "+" at 3274.61,6498.74 h60
LS1_3: Top Overlay "+" at 6475.61,6491.74 h60